# Altium PCB 3s2p battery pack.PcbDoc
Units mil, origin at the board's own origin, x right, y up, seen from the top; angles counter-clockwise.
Board outline 5680 x 3155 mil, 2 copper layers (Top Layer, Bottom Layer); 115 components, 106 nets, 411 pads, 0 vias.
Unrouted connection lines stored in the file: 277.
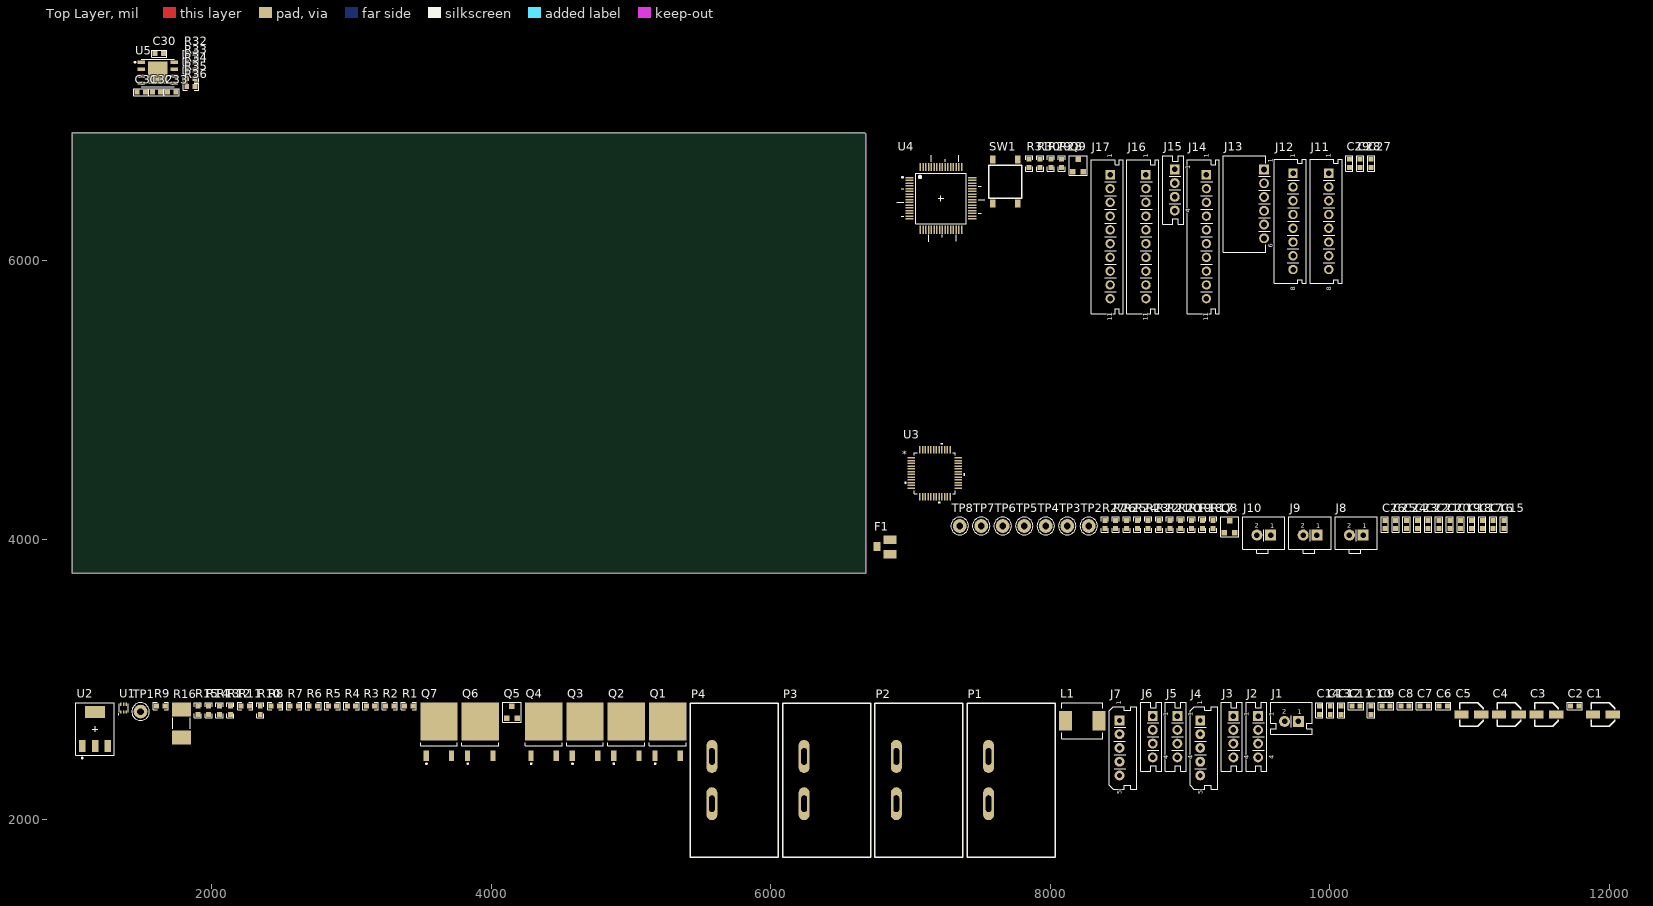
[diagram p0: Top Layer view]
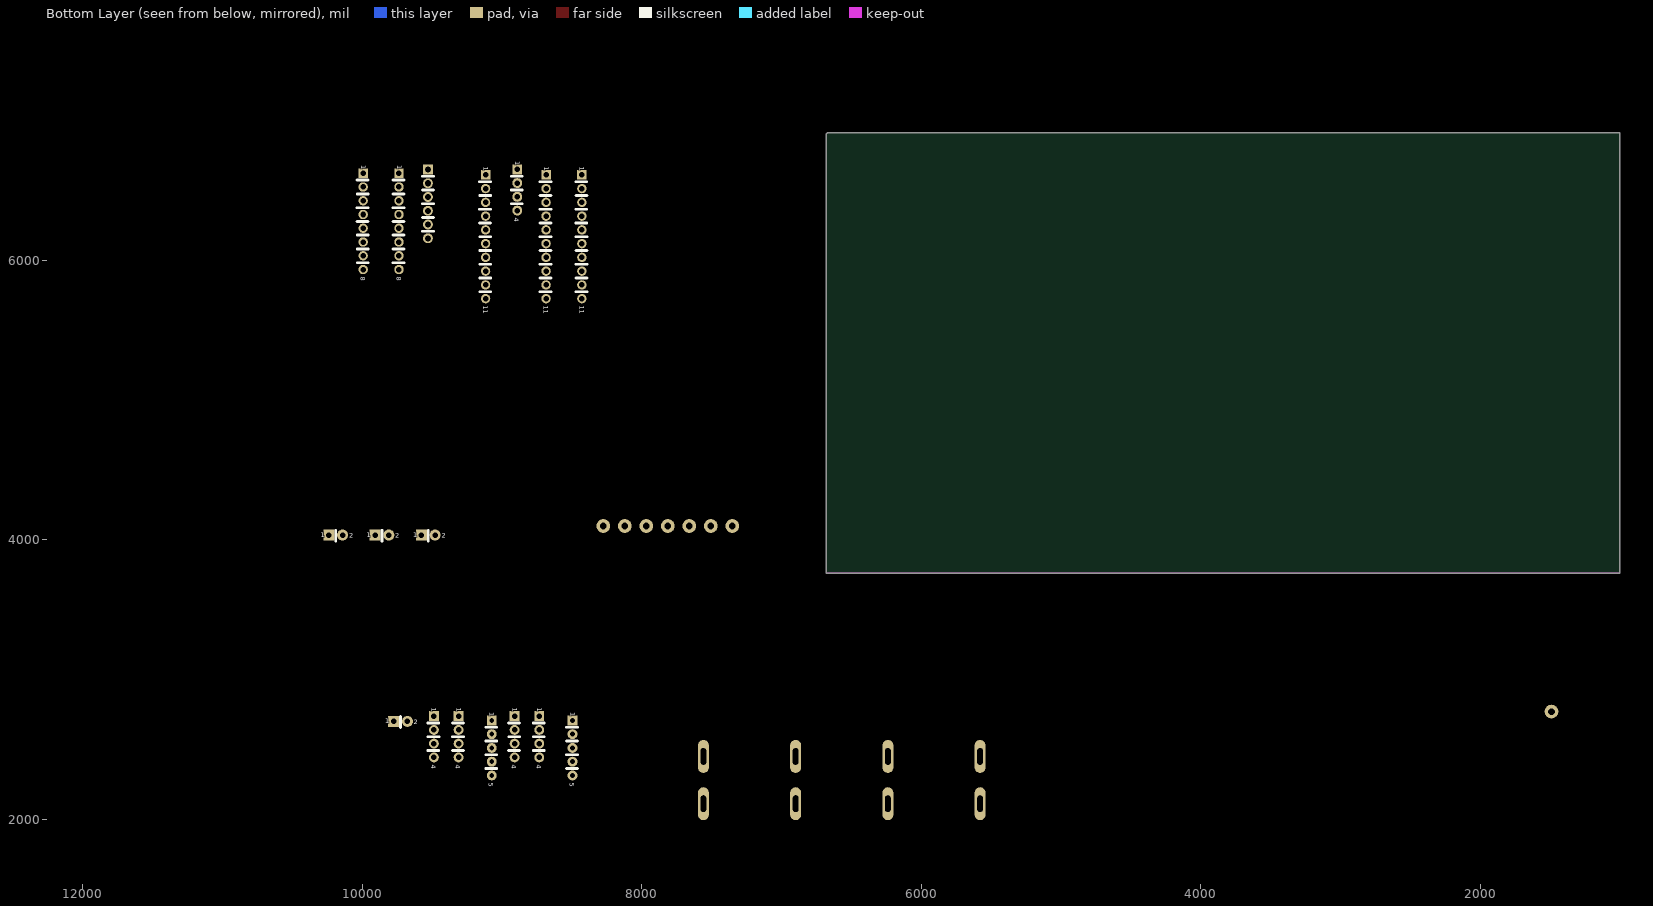
[diagram p1: Bottom Layer view, seen from below]

## Layer stack, top to bottom
Top Solder: solder mask 0.4, Solder Resist, Dk 3.5
Top Layer: signal copper 1.4
Dielectric 1: dielectric 12.6, FR-4, Dk 4.8
Bottom Layer: signal copper 1.4
Bottom Solder: solder mask 0.4, Solder Resist, Dk 3.5

## Board outline
1000,3760 1000,6915 6670,6915 6680,6905 6680,3760

## Design rules (kind name [scope] priority, off if disabled: settings)
Clearance [All] p1: gap=3.94 ignorepadtopadclearanceinfootprint=FALSE
PolygonConnect [All] p1: connectstyle=Relief reliefconductorwidth=10 reliefentries=4 polygonreliefangle="90 Angle" airgapwidth=10
RoutingVias [All] p1: holewidth=28 width=50 viastyle="Through Hole" minholewidth=28 minwidth=50 maxholewidth=28 maxwidth=50
SolderMaskExpansion [All] p1: expansion=4 istentingtop=FALSE
Width [All] p1: maxlimit=39.37 minlimit=4 preferedwidth=11.81
30 further rules are at their usual default settings.

## Classes and differential pairs
component class "U_Secondary protection": C30 C31 C32 C33 R32 R33 R34 R35 R36 U5
component class "U_Control and gauge": C27 C28 C29 J11 J12 J13 J14 J15 J16 J17 Q9 R28 R29 R30 R31 SW1 U4
component class "U_Cell monitoring and balancing": C15 C16 C17 C18 C19 C20 C21 C22 C23 C24 C25 C26 J8 J9 J10 Q8 R17 R18 R19 R20 R21 R22 R23 R24 R25 R26 R27 TP2 TP3 TP4 TP5 TP6 TP7 TP8 U3
component class Overview: C1 C2 C3 C4 C5 C6 C7 C8 C9 C10 C11 C12 C13 C14 F1 J1 J2 J3 J4 J5 J6 J7 L1 P1 P2 P3 P4 Q1 Q2 Q3 Q4 Q5 Q6 Q7 R1 R2 R3 R4 R5 R6 R7 R8 R9 R10 R11 R12 R13 R14 R15 R16 TP1 U1 U2

## Components (designator, comment, footprint, x,y, rotation, side; value= is the part's Value field where it differs from the comment)
C1 "PBE099540-1000" "CASE - B" 11954.05,2751.85 r0 top value=10uF
C2 "T542021037308" CAPC0603-RW 11751.77,2811.85 r0 top value=2.2uF
C3 "T551220435010" "CASE - B" 11549.49,2751.85 r0 top value=22uF
C4 "T551220435010" "CASE - B" 11281.46,2751.85 r0 top value=22uF
C5 "T551220435010" "CASE - B" 11013.43,2751.85 r0 top value=22uF
C6 "T542021037308" CAPC0603-RW 10811.15,2811.85 r0 top value=0.1uF
C7 "T542021037308" CAPC0603-RW 10674.62,2811.85 r0 top value=2.2uF
C8 "T542021037308" CAPC0603-RW 10538.09,2811.85 r0 top value=2.2uF
C9 "T542021037308" CAPC0603-RW 10401.57,2811.85 r0 top value=2.2uF
C10 "T542021037308" CAPC0603-RW 10294.57,2781.85 r90 top value=2.2uF
C11 "T542021037308" CAPC0603-RW 10187.57,2811.85 r0 top value=0.1uF
C12 "T542021037308" CAPC0603-RW 10080.57,2781.85 r90 top value=0.1uF
C13 "T542021037308" CAPC0603-RW 10003.09,2781.85 r90 top value=0.1uF
C14 "T542021037308" CAPC0603-RW 9925.62,2781.85 r90 top value=0.1uF
C15 "T542021037308" CAPC0603-RW 11245.86,4110 r90 top value=0.47uF
C16 "T542021037308" CAPC0603-RW 11168.39,4110 r90 top value=2.2uF
C17 "T542021037308" CAPC0603-RW 11090.92,4110 r90 top value=2.2uF
C18 "T542021037308" CAPC0603-RW 11013.44,4110 r90 top value=100pF
C19 "T542021037308" CAPC0603-RW 10935.97,4110 r90 top value=2.2uF
C20 "T542021037308" CAPC0603-RW 10858.5,4110 r90 top value=1uF
C21 "T542021037308" CAPC0603-RW 10781.03,4110 r90 top value=2.2uF
C22 "T542021037308" CAPC0603-RW 10703.55,4110 r90 top value=2.2uF
C23 "T542021037308" CAPC0603-RW 10626.08,4110 r90 top value=1uF
C24 "T542021037308" CAPC0603-RW 10548.61,4110 r90 top value=1uF
C25 "T542021037308" CAPC0603-RW 10471.14,4110 r90 top value=2.2uF
C26 "T542021037308" CAPC0603-RW 10393.66,4110 r90 top value=2.2uF
C27 "T542021037308" CAPC0603-RW 10294.83,6694.41 r90 top value=2.2uF
C28 "T542021037308" CAPC0603-RW 10217.36,6694.41 r90 top value=2.2uF
C29 "T542021037308" CAPC0603-RW 10139.89,6694.41 r90 top value=2.2uF
C30 "T542021037308" CAPC0603-RW 1624.02,7480.31 r0 top value=0.1uF
C31 "T542021037308" CAPC0603-RW 1496.06,7204.72 r0 top value=0.1uF
C32 "T542021037308" CAPC0603-RW 1604.33,7204.72 r0 top value=0.1uF
C33 "T542021037308" CAPC0603-RW 1712.6,7204.72 r0 top value=0.1uF
F1 "KED500004-0010" CLM1612P1412 6732.27,3917.32 r0 top
J1 "CCN250000-0102" "CONN 2P PH=2.5mm B2B-XH-A" 9725.31,2701.85 r0 top value=2.5mm
J2 "T690300164400" "CONN 4P PH=2.5mm 440052-4" 9486.81,2591.85 r90 top value=2.5mm
J3 "T690300164400" "CONN 4P PH=2.5mm 440052-4" 9310.31,2591.85 r90 top value=2.5mm
J4 "CCN250001-0105" "CONN 5P PH=2.5mm Molex 99-99-0989" 9072.79,2511.85 r90 top value=2.5mm
J5 "T690300164400" "CONN 4P PH=2.5mm 440052-4" 8909.09,2591.85 r90 top value=2.5mm
J6 "T690300164400" "CONN 4P PH=2.5mm 440052-4" 8732.59,2591.85 r90 top value=2.5mm
J7 "CCN250001-0105" "CONN 5P PH=2.5mm Molex 99-99-0989" 8495.07,2511.85 r90 top value=2.5mm
J8 "CCN250002-0102" "CONN 2P PH=2.5mm HAA250A-2 RED" 10189.42,4035 r0 top value=2.5mm
J9 "CCN250002-0102" "CONN 2P PH=2.5mm HAA250A-2 RED" 9858.39,4035 r0 top value=2.5mm
J10 "CCN250002-0102" "CONN 2P PH=2.5mm HAA250A-2 RED" 9527.37,4035 r0 top value=2.5mm
J11 "T690300135100" "CONN 8P PH=2.5 ST TJC3-8A-CS" 9992.73,6279.41 r90 top value=2.5mm
J12 "T690300135100" "CONN 8P PH=2.5 ST TJC3-8A-CS" 9736.51,6279.41 r90 top value=2.5mm
J13 "T690300121600" "CONN 6P PH=2.5mm RA XHB-6AW-KL" 9529.5,6404.41 r90 top value=2.5mm
J14 "T690300163300" "CONN 10P PH=2.5 ST TJC3-10A-CS" 9116.78,6169.41 r90 top value=2.5mm
J15 "T690300164400" "CONN 4P PH=2.5mm 440052-4" 8890.09,6504.41 r90 top value=2.5mm
J16 "T690300163300" "CONN 10P PH=2.5 ST TJC3-10A-CS" 8684.07,6169.41 r90 top value=2.5mm
J17 "T690300163300" "CONN 10P PH=2.5 ST TJC3-10A-CS" 8427.85,6169.41 r90 top value=2.5mm
L1 "T621000080700" "IND  CKST0603" 8228.95,2706.85 r0 top value=3.3uH
P1 "CJP012009-0070" "AC INLET 2P DB8-6S1" 7719.63,2281.85 r90 top
P2 "CJP012009-0070" "AC INLET 2P DB8-6S1" 7059.71,2281.85 r90 top
P3 "CJP012009-0070" "AC INLET 2P DB8-6S1" 6399.79,2281.85 r90 top
P4 "CJP012009-0070" "AC INLET 2P DB8-6S1" 5739.87,2281.85 r90 top
Q1 "T5860038503A6" TO252-3 5262.05,2626.85 r90 top
Q2 "T5860038503A6" TO252-3 4966.33,2626.85 r90 top
Q3 "T5860038503A6" TO252-3 4670.62,2626.85 r90 top
Q4 "T5860038503A6" TO252-3 4374.9,2626.85 r90 top
Q5 "SI2302CDS" SOT23-132-RW 4148.11,2766.85 r0 top
Q6 "T5860038503A6" TO252-3 3921.31,2626.85 r90 top
Q7 "T5860038503A6" TO252-3 3625.59,2626.85 r90 top
Q8 "T5810040804A0" 2SC2712GR 9282.92,4095 r0 top
Q9 "SI2302CDS" SOT23-132-RW 8199.15,6679.41 r0 top
R1 "T502976002399" 0603-RW 3409.47,2811.85 r0 top value=10K
R2 "T502976002399" 0603-RW 3272.94,2811.85 r0 top value=10K
R3 "T502976002399" 0603-RW 3136.42,2811.85 r0 top value=300
R4 "T502976002399" 0603-RW 2999.89,2811.85 r0 top value=300
R5 "T502976002399" 0603-RW 2863.36,2811.85 r0 top value=300
R6 "T502976002399" 0603-RW 2726.83,2811.85 r0 top value=300
R7 "T502976002399" 0603-RW 2590.31,2811.85 r0 top value=30K
R8 "T502976002399" 0603-RW 2453.78,2811.85 r0 top value=220K
R9 "T502976002399" 0603-RW 1635.57,2811.85 r0 top value=2.49M
R10 "T502976002399" 0603-RW 2346.78,2781.85 r90 top value=100K
R11 "T502976002399" 0603-RW 2239.78,2811.85 r0 top value=150K
R12 "T502976002399" 0603-RW 2132.78,2781.85 r90 top value=300
R13 "T502976002399" 0603-RW 2055.31,2781.85 r90 top value=300
R14 "T502976002399" 0603-RW 1977.83,2781.85 r90 top value=100
R15 "T502976002399" 0603-RW 1900.36,2781.85 r90 top value=100
R16 "QCF101250-1009" 2512 1782.73,2686.85 r90 top value=1mR
R17 "T502976002399" 0603-RW 9165.25,4110 r90 top value=100
R18 "T502976002399" 0603-RW 9087.77,4110 r90 top value=40
R19 "T502976002399" 0603-RW 9010.3,4110 r90 top value=40
R20 "T502976002399" 0603-RW 8932.83,4110 r90 top value=10M
R21 "T502976002399" 0603-RW 8855.36,4110 r90 top value=40
R22 "T502976002399" 0603-RW 8777.89,4110 r90 top value=40
R23 "T502976002399" 0603-RW 8700.41,4110 r90 top value=10k
R24 "T502976002399" 0603-RW 8622.94,4110 r90 top value=1K
R25 "T502976002399" 0603-RW 8545.47,4110 r90 top value=1K
R26 "T502976002399" 0603-RW 8468,4110 r90 top value=10K
R27 "T502976002399" 0603-RW 8390.52,4110 r90 top value=10K
R28 "T502976002399" 0603-RW 8081.47,6694.41 r90 top value=10
R29 "T502976002399" 0603-RW 8004,6694.41 r90 top value=10K
R30 "T502976002399" 0603-RW 7926.53,6694.41 r90 top value=10K
R31 "T502976002399" 0603-RW 7849.06,6694.41 r90 top value=0ohm
R32 "T502976002399" 0603-RW 1850.39,7480.31 r0 top value=10K
R33 "T502976002399" 0603-RW 1850.39,7421.26 r180 top value=200
R34 "T502976002399" 0603-RW 1850.39,7362.2 r0 top value=1K
R35 "T502976002399" 0603-RW 1850.39,7303.15 r0 top value=1K
R36 "T502976002399" 0603-RW 1850.39,7244.09 r0 top value=1K
SW1 "T670200014500" "TACT SW TS-1102S-250H9" 7677.21,6564.41 r90 top value=TACT
TP1 "BAT-" RT-01T-1.0B 1490.37,2771.85 r0 top
TP2 "CP1" RT-01T-1.0B 8274.86,4100 r0 top
TP3 "CP1" RT-01T-1.0B 8121,4100 r0 top
TP4 "CP1" RT-01T-1.0B 7967.14,4100 r0 top
TP5 "CP1" RT-01T-1.0B 7813.28,4100 r0 top
TP6 "CP1" RT-01T-1.0B 7659.43,4100 r0 top
TP7 "CP1" RT-01T-1.0B 7505.57,4100 r0 top
TP8 "CP1" RT-01T-1.0B 7351.71,4100 r0 top
U1 "CD1053GTF-Z" SOT-563 1369.45,2796.85 r0 top
U2 "T610600036508" SOT223 1165,2646.85 r0 top
U3 "PBQ76952PFBT" PFB48_TEX 7174.38,4478.35 r0 top
U4 "T610300097225" QFP50P1200X1200X160-64N 7217.64,6444.41 r0 top
U5 "BQ771801DPJT" WSON(6x5x0.8) 1614.17,7342.52 r0 top

## Footprints (in the part's own frame and the unit in brackets; to place one, negate y for a bottom-side part, rotate by r counter-clockwise, add the part's x,y. Pads: shape width x height; smd on the part's side, far side on the other; paste and mask are expansions set on the pad)
2SC2712GR [mm] "SOT23 -231  (SC-59 SST3)"
  rect 1x1 smd: 1(0.95,-1.1) 2(-0.95,-1.1) 3(0,1.1)
  silkscreen extent -1.65,-1.79 1.65,1.79, body extent -1.46,-1.17 1.46,1.17, height 1
0603-RW [mm]
  rect 0.9x0.9 smd mask+0.05: 1(-0.75,0) 2(0.75,0)
  silkscreen extent -1.39,-0.64 1.39,0.64, body extent -0.8,-0.41 0.8,0.39, height 0.3
2512 [mm] "Chip Resistor; Body 6.4 x 3.2 mm (LxW typ)"
  rect 2.5x3.4 smd mask+0.05: 1(-2.55,0) 2(2.55,0)
  silkscreen extent -1,-1.6 1,1.6, body extent -3.17,-1.5 3.18,1.5, height 1.6
"AC INLET 2P DB8-6S1" [mm] "AC SOCKET 2P D2.36 2.5A 250V VDE BLACK"
  oval 6x2 hole 1 slot 3 at 0 deg: 1(-4.3,4.1) 2(4.3,4.1)
  silkscreen extent -14,-8 14,8
CAPC0603-RW [mm] "Body size:  L1.6XW0.8XT0.8mm"
  rect 0.9x0.9 smd mask+0.05: 1(-0.75,0) 2(0.75,0)
  silkscreen extent -1.39,-0.64 1.39,0.64, body extent -0.8,-0.4 0.8,0.4, height 0.8
"CASE - B" [mm] "CHIP ELECT D4mm * H5.4mm"
  rect 2.6x1.5 smd mask+0.05: 1(1.8,0) 2(-1.8,0)
  silkscreen extent -2.15,-2.15 2.15,2.15, body extent -2.32,-2.12 2.28,2.18, height 5.4
CLM1612P1412 [mm] "3 end Fuse"
  rect 2.4x1.55 smd: 1(3.05,2.125) 3(3.05,-0.525)
  rect 1.2x1.6 smd: 2(0.7,0.9)
"CONN 2P PH=2.5mm B2B-XH-A" [mm] "CONN 2P PH=2.5mm B2B-XH-A H7mm"
  rect 2x2 hole 1: 1(1.25,0)
  round 2 hole 1: 2(-1.25,0)
  silkscreen extent -3.75,-2.35 3.75,3.45, body extent -3.7,-2.32 3.7,3.43, height 7
"CONN 2P PH=2.5mm HAA250A-2 RED" [mm] "CONN 2P PH=2.5mm HAA250A-2 RED"
  rect 2x2 hole 1: 1(1.25,0)
  round 2 hole 1: 2(-1.25,0)
  silkscreen extent -3.85,-3.3 3.85,3.3, body extent -3.85,-3.3 3.85,3.3, height 7.4
"CONN 4P PH=2.5mm 440052-4" [mm] "CONN 4P PH=2.5mm 440052-4"
  rect 1.8x1.8 hole 1: 1(3.75,0)
  round 1.8 hole 1: 2(1.25,0) 3(-1.25,0) 4(-3.75,0)
  silkscreen extent -6.25,-1.6 6.25,2.17, body extent -6.25,-1.6 6.25,2.2, height 6
"CONN 5P PH=2.5mm Molex 99-99-0989" [mm] "CONN 5P PH=2.5mm Molex 99-99-0989"
  rect 1.8x1.8 hole 0.9: 1(5,0)
  round 1.8 hole 0.9: 2(2.5,0) 3(0,0) 4(-2.5,0) 5(-5,0)
  silkscreen extent -7.5,-3.15 7.5,1.85, body extent -7.45,-3.1 7.45,1.8, height 5.95
"CONN 6P PH=2.5mm RA XHB-6AW-KL" [mm] "WAFER 6P XHB-6AW-KL"
  rect 1.8x1.8 hole 1.1: 1(6.25,0)
  round 1.8 hole 1.1: 2(3.75,0) 3(1.25,0) 4(-1.25,0) 5(-3.75,0) 6(-6.25,0)
  silkscreen extent -8.75,-1.11 8.75,7.43, body extent -8.75,-0.31 8.75,7.42, height 6.56
"CONN 8P PH=2.5 ST TJC3-8A-CS" [mm] "GP CONNECTOR 8PIN P=2.5"
  rect 1.7x1.7 hole 1: 1(8.75,0)
  round 1.7 hole 1: 2(6.25,0) 3(3.75,0) 4(1.25,0) 5(-1.25,0) 6(-3.75,0) 7(-6.25,0) 8(-8.75,0)
  silkscreen extent -11.29,-2.4 11.25,3.4, body extent -11.27,-2.4 11.23,3.4, height 7.2
"CONN 10P PH=2.5 ST TJC3-10A-CS" [mm] "GP CONNECTOR 10PIN P=2.5"
  rect 1.7x1.7 hole 1: 1(11.25,0)
  round 1.7 hole 1: 2(8.75,0) 3(6.25,0) 4(3.75,0) 5(1.25,0) 6(-1.25,0) 7(-3.75,0) 8(-6.25,0) 9(-8.75,0) 10(-11.25,0)
  silkscreen extent -14,-2.35 14,3.45, body extent -13.75,-2.35 13.75,3.45, height 7.2
"IND  CKST0603" [mm] "SMD MOLDING POWER INDUCTOR"
  rect 2.35x3.5 smd: 1(-3.025,0) 2(3.025,0)
  silkscreen extent -3.7,-3.3 3.7,3.3, body extent -3.8,-3.3 3.8,3.3, height 3
PFB48_TEX [mil]
  rect 53.28x11 smd paste+0 mask+0: 1(-168.14,108.27) 2(-168.14,88.58) 3(-168.14,68.9) 4(-168.14,49.21) 5(-168.14,29.53) 6(-168.14,9.84) 7(-168.14,-9.84) 8(-168.14,-29.53) 9(-168.14,-49.21) 10(-168.14,-68.9) 11(-168.14,-88.58) 12(-168.14,-108.27) 25(168.14,-108.27) 26(168.14,-88.58) 27(168.14,-68.9) 28(168.14,-49.21) 29(168.14,-29.53) 30(168.14,-9.84) 31(168.14,9.84) 32(168.14,29.53) 33(168.14,49.21) 34(168.14,68.9) 35(168.14,88.58) 36(168.14,108.27)
  rect 11x53.28 smd paste+0 mask+0: 13(-108.27,-168.14) 14(-88.58,-168.14) 15(-68.9,-168.14) 16(-49.21,-168.14) 17(-29.53,-168.14) 18(-9.84,-168.14) 19(9.84,-168.14) 20(29.53,-168.14) 21(49.21,-168.14) 22(68.9,-168.14) 23(88.58,-168.14) 24(108.27,-168.14) 37(108.27,168.14) 38(88.58,168.14) 39(68.9,168.14) 40(49.21,168.14) 41(29.53,168.14) 42(9.84,168.14) 43(-9.84,168.14) 44(-29.53,168.14) 45(-49.21,168.14) 46(-68.9,168.14) 47(-88.58,168.14) 48(-108.27,168.14)
  silkscreen extent -215,-215 215,215, body extent -181,-181 181,181, height 47
QFP50P1200X1200X160-64N [mm] "QFP,0.50mm pitch,square;64 pin,10.00mm L X 10.00mm W X 1.60mm H body"
  rect 1.5x0.28 smd mask+0.12: 1(-5.7,3.75) 2(-5.7,3.25) 3(-5.7,2.75) 4(-5.7,2.25) 5(-5.7,1.75) 6(-5.7,1.25) 7(-5.7,0.75) 8(-5.7,0.25) 9(-5.7,-0.25) 10(-5.7,-0.75) 11(-5.7,-1.25) 12(-5.7,-1.75) 13(-5.7,-2.25) 14(-5.7,-2.75) 15(-5.7,-3.25) 16(-5.7,-3.75) 33(5.7,-3.75) 34(5.7,-3.25) 35(5.7,-2.75) 36(5.7,-2.25) 37(5.7,-1.75) 38(5.7,-1.25) 39(5.7,-0.75) 40(5.7,-0.25) 41(5.7,0.25) 42(5.7,0.75) 43(5.7,1.25) 44(5.7,1.75) 45(5.7,2.25) 46(5.7,2.75) 47(5.7,3.25) 48(5.7,3.75)
  rect 0.28x1.5 smd mask+0.12: 17(-3.75,-5.7) 18(-3.25,-5.7) 19(-2.75,-5.7) 20(-2.25,-5.7) 21(-1.75,-5.7) 22(-1.25,-5.7) 23(-0.75,-5.7) 24(-0.25,-5.7) 25(0.25,-5.7) 26(0.75,-5.7) 27(1.25,-5.7) 28(1.75,-5.7) 29(2.25,-5.7) 30(2.75,-5.7) 31(3.25,-5.7) 32(3.75,-5.7) 49(3.75,5.7) 50(3.25,5.7) 51(2.75,5.7) 52(2.25,5.7) 53(1.75,5.7) 54(1.25,5.7) 55(0.75,5.7) 56(0.25,5.7) 57(-0.25,5.7) 58(-0.75,5.7) 59(-1.25,5.7) 60(-1.75,5.7) 61(-2.25,5.7) 62(-2.75,5.7) 63(-3.25,5.7) 64(-3.75,5.7)
  silkscreen extent -8.05,-7.85 7.98,7.8, body extent -5.82,-5.77 5.76,5.82, height 1.02
RT-01T-1.0B [mm] "TERMINAL 11MM"
  round 2.5 hole 1.2: 1(0,0)
  silkscreen extent -1.6,-1.6 1.6,1.6, body extent -0.99,-1 1,1, height 6.7
SOT23-132-RW [mm]
  rect 1x1 smd: 1(-0.95,-1.1) 2(0.95,-1.1) 3(0,1.1)
  silkscreen extent -1.65,-1.79 1.65,1.79, body extent -1.46,-1.17 1.46,1.17, height 1
SOT223 [mm]
  rect 1.2x2.2 smd: 1(-2.3,-3.1) 2(0,-3.1) 3(2.3,-3.1)
  rect 3.6x2.2 smd: 4(0,3.1)
  silkscreen extent -3.5,-5.37 3.5,4.8, body extent -3.35,-3.6 3.35,3.6, height 1.86
SOT-563 [mm] "Body:1.6 x 1.6 mm, Height: 0.6mm, Pitch:0.5mm"
  rect 0.25x0.6 smd: 1(-0.5,-0.7) 2(0,-0.7) 3(0.5,-0.7) 4(0.5,0.7) 5(0,0.7) 6(-0.5,0.7)
  silkscreen extent -1.01,-1.18 0.8,0.8, body extent -0.8,-0.8 0.8,0.8, height 0.6
"TACT SW TS-1102S-250H9" [mm] "SMD TACT SWITCH 6*6*9mm TS-1102S-250H9"
  rect 1.5x1 smd mask+0.05: A(-4,2.25) B(4,2.25) C(-4,-2.25) D(4,-2.25)
  silkscreen extent -3,-3 3,3, body extent -4.25,-3.01 4.25,3, height 9
TO252-3 [mm] "D-PAK, 3-Leads, Body 6.5x7.0mm, Pitch 2.3mm, Lead Span 9.7mm, IPC Medium Density"
  rect 1.9x0.95 smd: 1(-4.35,2.3) 3(-4.35,-2.3)
  rect 6.9x6.8 smd: 4(1.85,0)
  silkscreen extent -5.87,-3.35 -2,3.35, body extent -4.8,-3.24 5.14,3.3, height 2.39
WSON(6x5x0.8) [mm] "IC FLASH 128MBIT 104MHZ ;8WSON"
  rect 3.5x4.1 smd: 0(0,0)
  rect 1.4x0.6 smd: 1(-3,1.905) 2(-3,0.635) 3(-3,-0.635) 4(-3,-1.905) 5(3,-1.905) 6(3,-0.635) 7(3,0.635) 8(3,1.905)
  silkscreen extent -4.25,-2.5 3,2.5, body extent -3,-2.5 3,2.5, height 0.8

## Part data
C1: library part "CAP E 10uF 16V 20% SMD", "CHIP ELECT 10uF 16V SMD 4x4mm", PACKAGE="CASE - B", Tolerance=20%, Voltage=16V, Customer Specific=N/A, DIP&SMD=SMD, MFG=佳维诚, SAP=T551100435010, Type=Capacitor, Vendor Code=10020154, Vendor Name=惠州市佳维诚电子有限公司
C2 C6 C7 C8 C9 C10 C11 C12 C13 C14 C15 C16 C17 C18 C19 C20 C21 C22 C23 C24 C25 C26 C27 C28 C29 C30 C31 C32 C33: library part "CAP0603 0.01uF 16V 10%_X7R_WALSIN", "CAP X7R .01UF 16V +-10% 0603 WALSIN L", PACKAGE=CAPC0603, Tolerance=10%, Voltage=16V, CREATE_NAME=Nathan, CREATE_TIME=13-July-2016, Customer Specific=N/A, DIP&SMD=SMD, MFG=WALSIN, Other=X7R, SAP=T542021037308, Type=Capacitor
C3 C4 C5: library part "CAP E 22uF 16V 20% SMD_VEJ220M1CTR-0405", "E 22UF 16V +-20% 4.3X4. VEJ220M1C K", PACKAGE="CASE - B", Voltage=16V, CREATE_NAME=Nathan, CREATE_TIME=01-Mar-2019, Customer Specific=N/A, DIP&SMD=SMD, MFG=LELON, MFG Part=VEJ220M1CTR-0405, SAP=T551220435010, Type=Capacitor
F1: library part CLM1612P1412, "3 Terminal Fuse 12A 3S", CREATE_NAME=Tom, CREATE_TIME=14-Apr-2015, DIP&SMD=DIP, MFG="XIAMEN G&P", MFG Part=YG212-12031, SAP=T575009990164, Type=LED
J1: library part "CONN 2P PH=2.5mm B2B-XH-A", "GP CONNECTOR B2B-XH-A 2 PIN G", Current=3A, DIP&SMD=DIP, MFG=金瑞康, MFG Part=HAA250A-2A-WHITE, SAP=T690300041200, Type=Connector, Vendor Code=10009989, Vendor Name=亿源电子有限公司
J2 J3 J5 J6 J15: library part "CONN 4P PH=2.5mm 440052-4_TE", "GP CONNECTOR B4B-XH-A 4 PIN", CREATE_NAME=Nathan, CREATE_TIME=10-APR-2019, DIP&SMD=DIP, MFG=TE, MFG Part=440052-4, SAP=T690300164400, Type=Connector
J4 J7: library part "CONN 5P PH=2.5mm Molex 99-99-0989", "CONNECTOR 5PIN P=2.5mm 180'", Current=3A, CREATE_NAME=Nathan, CREATE_TIME=10-Feb-2015, DIP&SMD=DIP, MFG=Molex, MFG Part=99-99-0989, SAP=T690300024200, Type=Connector
J8 J9 J10: library part "CONN 2P PH=2.5mm HAA250A-2 RED", "CONNECTOR HA2.5 2PIN RED G", Current=3A, CREATE_NAME=Nathan, CREATE_TIME=15-June-2016, DIP&SMD=DIP, MFG=金瑞康, MFG Part="HAA250A-2 RED", SAP=T690300024700, Type=Connector
J11 J12: library part "CONN 8P PH=2.5 ST TJC3-8A-CS", "CONN 8PIN P2.5 M\180 TJC3-8A-CS K", Current=3A, CREATE_NAME=Nathan, CREATE_TIME=21-Mar-2018, DIP&SMD=DIP, MFG=JINJIA, MFG Part=TJC3-8A-CS, SAP=T690300135100, Type=Connector
J13: library part "CONN PH 6P PH=2.5mm RA XHB-6AW-KL", "CONNECTOR 6PIN P=2.5 WHITE 90 K", CREATE_NAME=Nathan, CREATE_TIME=27-Sep-2017, DIP&SMD=DIP, MFG=金佳电子, MFG Part=XHB-6AW-KL, SAP=T690300121600, Type=Connector
J14 J16 J17: library part "CONN 10P PH=2.5 ST TJC3-10A-CS", "CONN 10PIN P2.5 M\180 TJC3-10A-CS K", Current=3A, CREATE_NAME=Nathan, CREATE_TIME=19-Mar-2019, DIP&SMD=DIP, MFG=JINJIA, MFG Part=TJC3-10A-CS, SAP=T690300163300, Type=Connector
L1: library part "IND 3.3uH CKST0603-3.3UH\M", "3.3UH 6A 100K SMD CENKER CKST060 K", CREATE_NAME=Nathan, CREATE_TIME=13-Mar-2019, DCR=26mohm, DIP&SMD=SMD, Irms=6A, Isat=9.5A, MFG=CENKER, MFG Part=CKST0603-3.3UH\M, SAP=T621000080700, Type=INDUCTOR
P1 P2 P3 P4: library part "AC INLET 2P DB8-6S1 Polar", "AC SOCKET 2P D2.36 2.5A 250V VDE BLACK", Current=5A, DIP&SMD=DIP, MFG=金明浩, SAP=T690300011600, Type=Connector, Vendor Code=10010007, Vendor Name=深圳市金明浩电子科技有限公司
  P1: MFG Part=BAT+
  P2 P4: MFG Part=PACK+
  P3: MFG Part=BAT-
Q1 Q2 Q3 Q4 Q6 Q7: library part "NMOS LSG60R240HT", "NMOS 600V LSG60R240HT TO252( LONTEN K", Current=17A, PACKAGE=TO252, Voltage=600V, CREATE_NAME=Nathan, CREATE_TIME=12-Oct-2019, Customer Specific=N/A, DIP&SMD=SMD, MFG=LONTEN, MFG Part=LSG60R240HT, SAP=T5860038503A6, Type="N-CHANNEL MOSFET"
Q5 Q9: "NMOS FET-Si2302CDS", PACKAGE="SOT23 (TO-236)", CREATE_NAME=Nathan, CREATE_TIME=17-Nov-2020, Customer Specific=N/A, DIP&SMD=SMD, MFG=VISHAY, MFG Part=SI2302CDS, Type=NMOS
Q8: library part 2SC2712GR, "NPN 50V 2SC2712GR SOT23 BLUE R K", Current=0.15A, PACKAGE="SOT23 (SC-59 SST3)", Voltage=50V, CREATE_NAME=Nathan, CREATE_TIME=14-July-2017, Customer Specific=N/A, DIP&SMD=SMD, MFG="BLUE ROCKET(藍箭電子)", MFG Part=2SC2712GR, SAP=T5810040804A0, Type=NPN
R1 R2 R3 R4 R5 R6 R7 R8 R9 R10 R11 R12 R13 R14 R15 R17 R18 R19 R20 R21 R22 R23 R24 R25 R26 R27 R28 R29 R30 R31 R32 R33 R34 R35 R36: library part "RES0603 1/10W +-1% 976 OHM 100PPM", "CHIP 976 OHM 100PPM +-1% 0603 WALS L", PACKAGE=0603, Power=0.1W, CREATE_NAME=Tom, CREATE_TIME=17-Dec-2015, Customer Specific=N/A, DIP&SMD=SMD, MFG=WALSIN, SAP=T502976002399, TOL=+-1%, Type=Resistor
R16: library part "RES2512 1W 1% 10 OHM", "CHIP RES. 10 OHM 1W 1% 2512", PACKAGE=2512, Power=1W, Customer Specific=N/A, DIP&SMD=SMD, SAP=T502100A07399, TOL=1%, Type=Resistor, Vendor Code=10010262, Vendor Name=东莞市晴远电子有限公司
SW1: library part "TACT SW TS-1102S-250H9", "TACT SW TS-1102S-250H9 JINGJU K", Current=50mA, Voltage=12V, CREATE_NAME=Nathan, CREATE_TIME=07-May-2019, Customer Specific=N/A, DIP&SMD=SMD, MFG=JINGJU, MFG Part=TS-1102S-250H9, SAP=T670200014500, Type=Switch
TP1 TP2 TP3 TP4 TP5 TP6 TP7 TP8: library part "TERMINAL RT-01T-1.0B", "TERMINAL 11MM G", CREATE_NAME=Nathan, CREATE_TIME=07-July-2016, DIP&SMD=DIP, MFG=利民豐（JST), MFG Part=RT-01T-1.0B, SAP=T690300035900
U1: PACKAGE=SOT-563, CREATE_NAME=Nathan, CREATE_TIME=13-Jun-2020, Customer Specific=N/A, DIP&SMD=SMD, MFG=MPS, MFG Part=TPS566247
U2: library part LD1117AG-3.3-AA3-A-R_101, "REG LD1117AG-3.3-AA3- SOT223 UTC L", CREATE_NAME=Tom, CREATE_TIME=23-Apr-2019, Customer Specific=N/A, DIP&SMD=SMD, MFG=UTC, MFG Part=LD1117AG-3.3-AA3-A-R, SAP=T610600036508, Type=IC
U3: "No Description Available", Mfr_Name="Texas Instruments", RefDes=RefDes, Type=Type
U4: library part STM32F030RCT6TR, "MCU STM32F030RCT6TR LQFP64 ST K", CREATE_NAME=Nathan, CREATE_TIME=02-NOV-2017, Customer Specific=N/A, DIP&SMD=SMD, MFG="ST     (STM意法半導體)", MFG Part=STM32F446RET6, SAP=T610300097225, Type=IC
U5: library part CMP-0078897-2, "Family 2-5S Overvoltage Protector with Internal Delay Timer, DPJ0008A (WSON-8)", Alternate Manufacturer="Texas Instruments", Alternate PartNumber=BQ771801DPJR, AEC Category=Q200, AEC Qualified=N, ComponentLink1Description="Datasheet Link", ComponentLink1URL=http://www.ti.com/lit/ds/symlink/bq7718.pdf, ComponentLink2Description="Product Folder", ComponentLink2URL=http://www.ti.com/product/bq7718, CompType=IC, Manufacturer="Texas Instruments", MountType=SMT, PackageDescription=WSON-8, PackageReference=DPJ0008A, PartNumber=BQ771801DPJT, RoHS=Y, SizeArea_mm2=12, SizeAreaWB_mm2=20, SizeX_mm=4, SizeY_mm=3, SizeZ_mm=0.8

## Nets (pads, with @x,y where several pads share a name; then routed paths per layer and width w, separated by ;. In a path a pad name is that pad's centre, name@x,y a point inside that pad or via, vN(x,y) a via of type N, cw(c..) or ccw(c..) an arc to the next point about the centre after c; other vN are vias at no path point)
3.3V: C8.1 C27.2 C28.1 J2.4 J4.5 J11.2 J12.7 J12.8 J13.1 J14.3 J15.4 J17.1 R29.1 R30.1 SW1.B U2.2 U2.4 U4.1 U4.13 U4.19 U4.32 U4.48 U4.64
5V: C3.1 C4.1 C5.1 C7.1 L1.2 R8.1 U2.3
BAT+: C1.1 C2.1 C11.1 C16.2 J3.4 P1.1 P1.2 R10.2 R17.1 R18.1 R32.2 R34.2 U1.1
BKL: Q9.1 U4.54
BREG: Q8.2 R20.1 U3.37
CD: Q1.4 Q2.4 Q3.4 Q4.4 Q6.4 Q7.4 Q8.3
Cell0: C26.2 R22.2 U3.16
Cell1: C21.1 C25.2 R21.2 U3.15
Cell2: C19.1 C21.2 R19.2 U3.14
Cell3: C16.1 C19.2 R18.2 U3.13
CP1: C15.1 TP2.1 U3.46
CS: J11.7 U4.61
D/C: J11.6 U4.62
FUSE: C6.1 J1.2 Q5.1 R9.1 R33.1
GND: C1.2 C2.2 C3.2 C4.2 C5.2 C6.2 C7.2 C8.2 C13.2 C17.1 C18.1 C20.1 C22.1 C23.1 C24.1 C25.1 C26.1 C27.1 C29.1 C30.2 C33.2 J2.1 J3.1 J4.1 J5.1 J6.1 J7.1 J8.2 J10.1 J11.1 J12.1 J12.2 J13.6 J14.1 J15.1 J16.10 J17.10 P3.1 P3.2 Q5.2 Q9.2 R7.2 R9.2 R11.1 R14.1 R16.2 R20.2 R22.1 R23.2 R24.1 R25.1 R31.2 TP1.1 U1.3 U1.4 U2.1 U3.17 U3.29 U3.30 U3.33 U4.18 U4.31 U4.47 U4.60 U4.63 U5.0 U5.7
LD: R1.2 U3.41
NetC9_1: C9.1 C10.1 R15.2 U3.20
NetC9_2: C9.2 C10.2 R14.2 U3.18
NetC11_2: C11.2 C13.1
NetC12_2: C12.2 C14.1
NetC15_2: C15.2 C17.2 C18.2 R17.2 U3.47
NetC22_2: C22.2 Q8.1 U3.36
NetC23_2: C23.2 TP4.1 U3.34
NetC24_2: C24.2 TP5.1 U3.24
NetC29_2: C29.2 U4.30
NetC30_1: C30.1 R32.1 U5.1
NetC31_1: C31.1 R34.1 U5.2 U5.3 U5.4
NetC31_2: C31.2 C32.1 R35.1 U5.5
NetC32_2: C32.2 C33.1 R36.1 U5.6
NetF1_3: F1.3 Q1.3 Q3.3 Q6.3
NetJ1_1: J1.1 U3.38
NetJ2_2: J2.2 U4.37
NetJ2_3: J2.3 U4.38
NetJ3_2: J3.2 R21.1 R36.2
NetJ3_3: J3.3 R19.1 R35.2
NetJ4_2: J4.2 U4.53
NetJ4_3: J4.3 U4.52
NetJ4_4: J4.4 U4.51
NetJ5_2: J5.2 U4.43
NetJ5_3: J5.3 U4.42
NetJ5_4: J5.4 J6.4 J7.5
NetJ6_2: J6.2 U4.17
NetJ6_3: J6.3 U4.16
NetJ7_2: J7.2 U4.9
NetJ7_3: J7.3 U4.34
NetJ7_4: J7.4 U4.10
NetJ8_1: J8.1 TP6.1 U3.23
NetJ9_1: J9.1 R23.1
NetJ9_2: J9.2 TP8.1 U3.22
NetJ10_2: J10.2 TP7.1 U3.21
NetJ11_8: J11.8 R28.2
NetL1_1: L1.1 U1.2
NetQ1_1: Q1.1 R3.1
NetQ2_1: Q2.1 R4.2
NetQ3_1: Q3.1 R5.1
NetQ4_1: Q4.1 R6.2
NetQ6_1: Q6.1 R12.1
NetQ7_1: Q7.1 R13.2
NetQ9_3: Q9.3 R28.1
NetR3_2: R3.2 R5.2 R12.2 U3.45
NetR4_1: R4.1 R6.1 R13.1 U3.43
NetR7_1: R7.1 R8.2 U1.6
NetR10_1: R10.1 R11.2 U1.5
NetR24_2: R24.2 U3.25
NetR25_2: R25.2 U3.28
NetR26_1: R26.1 R30.2 U3.27 U4.59
NetR27_1: R27.1 R29.2 U3.26 U4.58
NetR33_2: R33.2 U5.8
PA0: J16.8 U4.14
PA1: J16.9 U4.15
PA4: J17.2 U4.20
PA5: J17.3 U4.21
PA6: J17.4 U4.22
PA7: J17.5 U4.23
PA8: J14.8 U4.41
PA11: J14.9 U4.44
PACK+: C12.1 P2.1 P2.2 Q2.3 Q4.3 Q7.3 R1.1 R2.1
PACK_SENSE: R2.2 U3.42
PB0: J17.7 U4.26
PB1: J17.8 U4.27
PB2: J17.9 U4.28
PB14: J14.4 U4.35
PB15: J14.5 U4.36
PC0: J16.6 U4.8
PC1: J16.7 U4.11
PC4: J17.6 U4.24
PC8: J14.6 U4.39
PC9: J14.7 U4.40
PC13: J16.1 U4.2
PC14: J16.2 U4.3
PC15: J16.3 U4.4
PF0: J16.4 U4.5
PF1: J16.5 U4.6
PGND: C14.2 P4.1 P4.2 R15.1 R16.1
REG1: C20.2 R26.2 R27.2 TP3.1 U3.35
RST: J13.5 U4.7
RST_SCR: J11.5 J14.10 U4.45
SPI1_MISO/SDA: J11.3 J12.4 U4.56
SPI1_MOSI/SCL: J11.4 J12.5 U4.57
SPI1_SCK: J12.3 U4.55
SWCLK: J13.3 U4.49
SWDIO: J13.2 U4.46
UART3_RX: J15.3 U4.25
UART3_TX: J15.2 U4.29
VSSA: C28.2 R31.1 U4.12
WAKE: SW1.C U4.33
pads on no net: F1.1 F1.2 J12.6 J13.4 J14.2 Q5.3 SW1.A SW1.D U3.1 U3.2 U3.3 U3.4 U3.5 U3.6 U3.7 U3.8 U3.9 U3.10 U3.11 U3.12 U3.19 U3.31 U3.32 U3.39 U3.40 U3.44 U3.48 U4.50

## Keep-outs
Keep-Out Layer:
  the board outline again, w7.87

## Text inside footprints (layer, text, board x,y; h text height)
J1: Top Overlay "2" at 9659.31,2754.85 h35; Top Overlay "1" at 9771.31,2751.85 h35; Bottom Overlay "2" at 9629.31,2682.85 h35; Bottom Overlay "1" at 9833.31,2687.85 h35
J2: Top Overlay "1" at 9597.04,2739.49 h35 r90; Top Overlay "4" at 9597.04,2429.45 h35 r90; Bottom Overlay "1" at 9500.81,2798.28 h35 r90; Bottom Overlay "4" at 9506.81,2391.06 h35 r90
J3: Top Overlay "1" at 9420.55,2739.49 h35 r90; Top Overlay "4" at 9420.55,2429.45 h35 r90; Bottom Overlay "1" at 9324.31,2798.28 h35 r90; Bottom Overlay "4" at 9330.31,2391.06 h35 r90
J4: Top Overlay "1" at 9085.59,2821.89 h35 r90; Top Overlay "5" at 9089.52,2181.14 h35 r90; Bottom Overlay "1" at 9086.79,2767.49 h35 r90; Bottom Overlay "5" at 9092.79,2263.85 h35 r90
J5: Top Overlay "1" at 9019.33,2739.49 h35 r90; Top Overlay "4" at 9019.33,2429.45 h35 r90; Bottom Overlay "1" at 8923.09,2798.28 h35 r90; Bottom Overlay "4" at 8929.09,2391.06 h35 r90
J6: Top Overlay "1" at 8842.83,2739.49 h35 r90; Top Overlay "4" at 8842.83,2429.45 h35 r90; Bottom Overlay "1" at 8746.59,2798.28 h35 r90; Bottom Overlay "4" at 8752.59,2391.06 h35 r90
J7: Top Overlay "1" at 8507.87,2821.89 h35 r90; Top Overlay "5" at 8511.81,2181.14 h35 r90; Bottom Overlay "1" at 8509.07,2767.49 h35 r90; Bottom Overlay "5" at 8515.07,2263.85 h35 r90
J8: Top Overlay "2" at 10123.42,4088 h35; Top Overlay "1" at 10235.42,4085 h35; Bottom Overlay "2" at 10093.42,4016 h35; Bottom Overlay "1" at 10297.42,4021 h35
J9: Top Overlay "2" at 9792.39,4088 h35; Top Overlay "1" at 9904.39,4085 h35; Bottom Overlay "2" at 9762.39,4016 h35; Bottom Overlay "1" at 9966.39,4021 h35
J10: Top Overlay "2" at 9461.37,4088 h35; Top Overlay "1" at 9573.37,4085 h35; Bottom Overlay "2" at 9431.37,4016 h35; Bottom Overlay "1" at 9635.37,4021 h35
J11: Top Overlay "1" at 10007.49,6734.13 h35 r90; Top Overlay "8" at 10008.7,5784.33 h35 r90; Bottom Overlay "1" at 10006.73,6682.69 h35 r90; Bottom Overlay "8" at 10009.46,5882.17 h35 r90
J12: Top Overlay "1" at 9751.27,6734.13 h35 r90; Top Overlay "8" at 9752.48,5784.33 h35 r90; Bottom Overlay "1" at 9750.51,6682.69 h35 r90; Bottom Overlay "8" at 9753.24,5882.17 h35 r90
J13: Top Overlay "1" at 9590.52,6699.69 h35 r90; Top Overlay "6" at 9590.52,6092.4 h35 r90
J14: Top Overlay "1" at 9132.53,6734.37 h35 r90; Top Overlay "11" at 9130.78,5568.62 h35 r90; Bottom Overlay "1" at 9130.78,6671.11 h35 r90; Bottom Overlay "11" at 9133.52,5675.31 h35 r90
J15: Top Overlay "1" at 9000.33,6652.05 h35 r90; Top Overlay "4" at 9000.33,6342.01 h35 r90; Bottom Overlay "1" at 8904.09,6710.83 h35 r90; Bottom Overlay "4" at 8910.09,6303.62 h35 r90
J16: Top Overlay "1" at 8699.81,6734.37 h35 r90; Top Overlay "11" at 8698.07,5568.62 h35 r90; Bottom Overlay "1" at 8698.07,6671.11 h35 r90; Bottom Overlay "11" at 8700.8,5675.31 h35 r90
J17: Top Overlay "1" at 8443.59,6734.37 h35 r90; Top Overlay "11" at 8441.85,5568.62 h35 r90; Bottom Overlay "1" at 8441.85,6671.11 h35 r90; Bottom Overlay "11" at 8444.58,5675.31 h35 r90
U3: Top Overlay "*" at 6942.1,4586.46 h50; Mechanical 13 "*" at 7035.38,4571.46 h50